# EAGLE board module_interface_hat v88 (EAGLE 9.7.0)
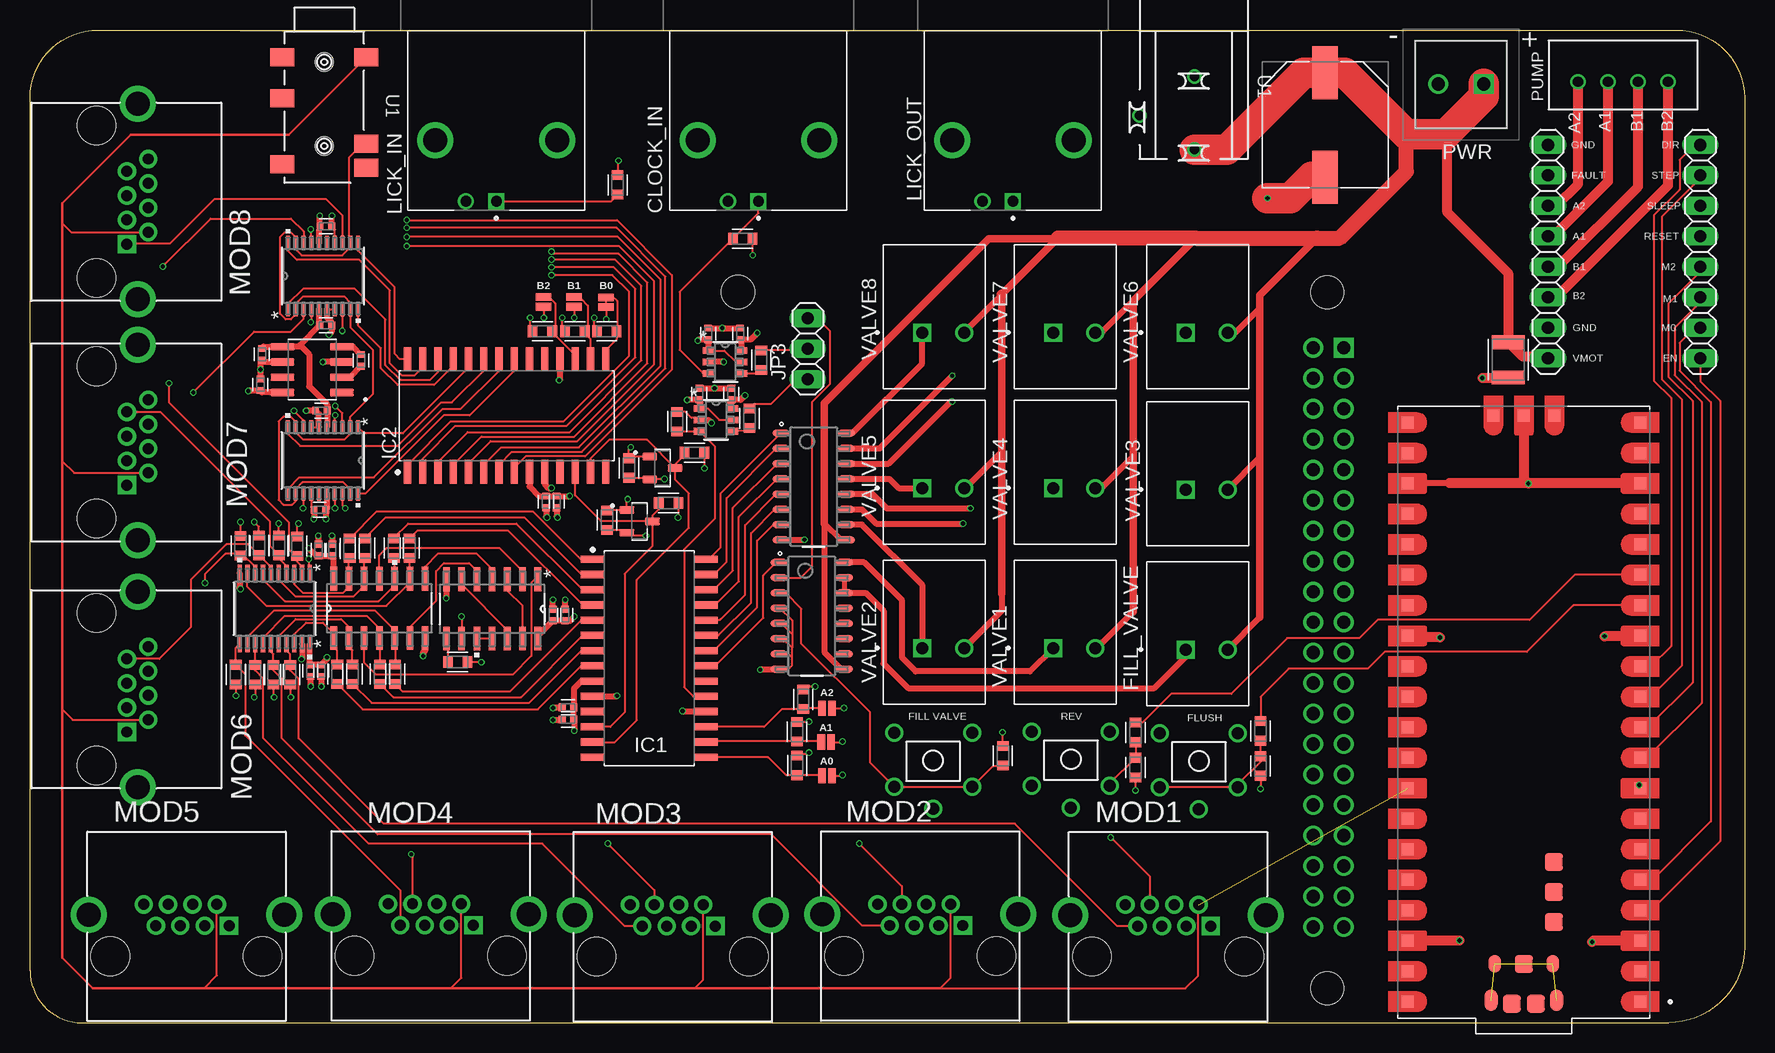
[diagram p0: board, top side]
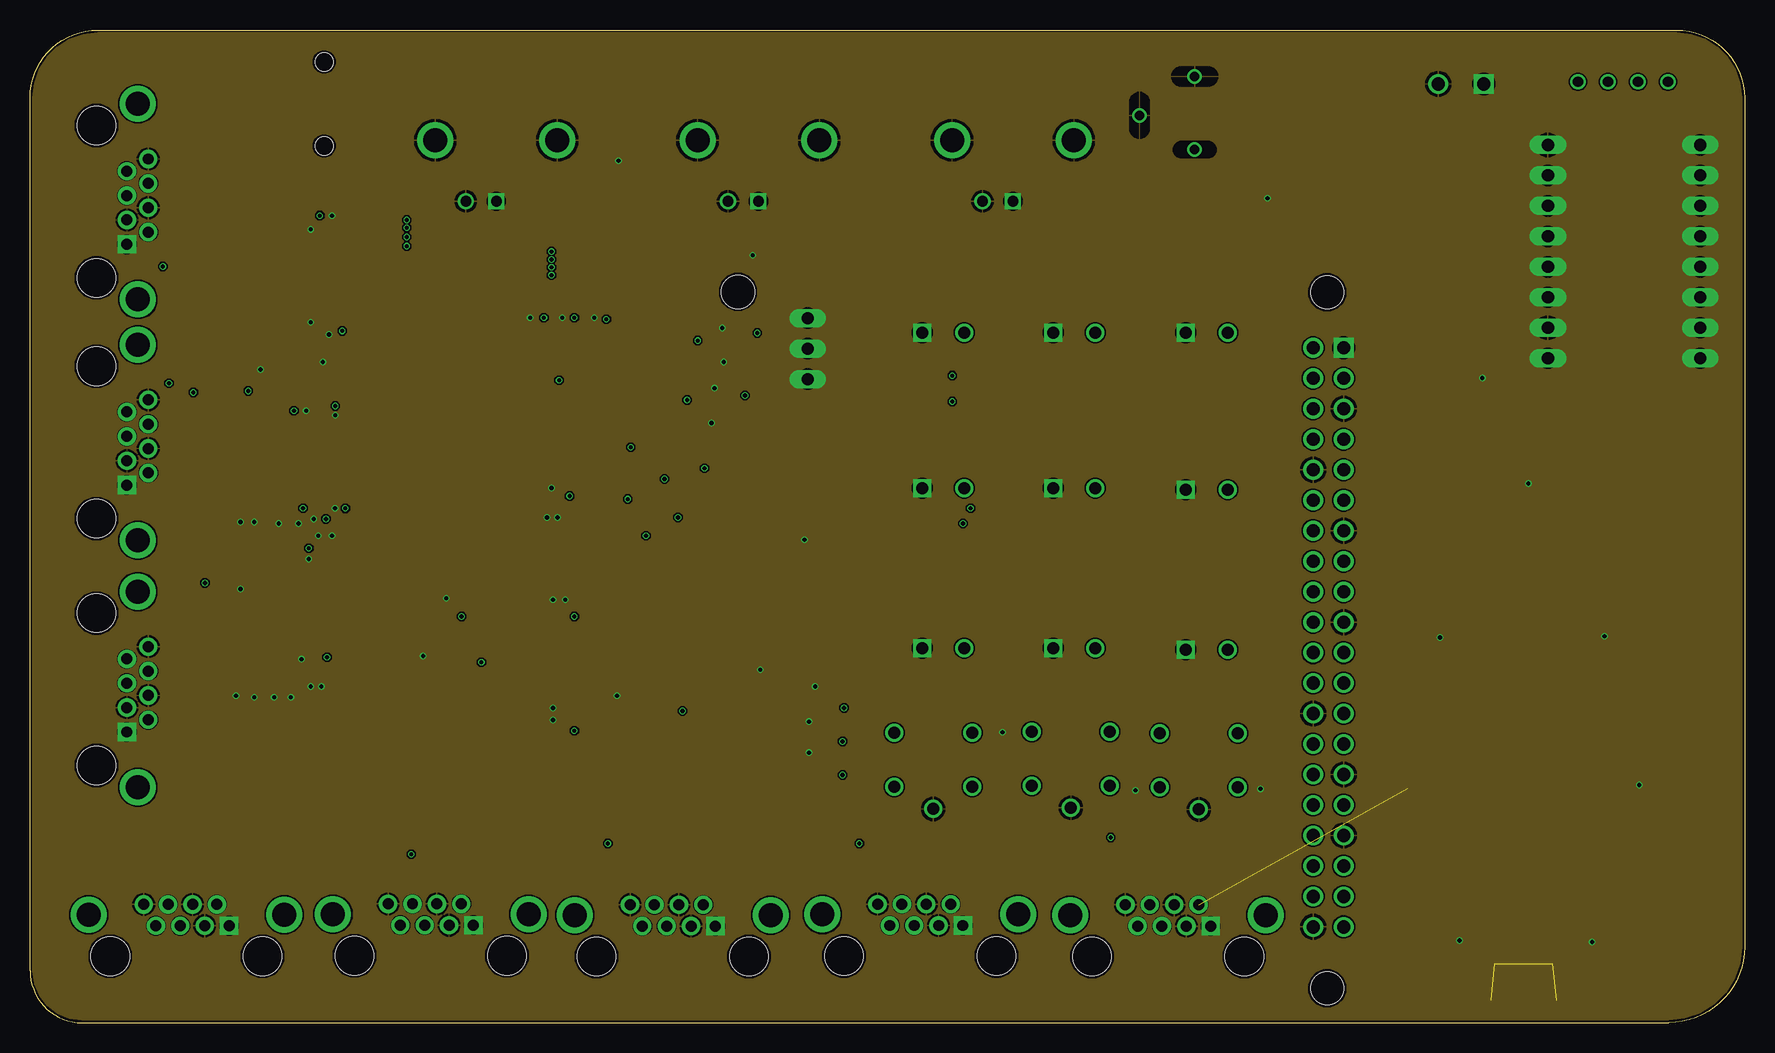
[diagram p1: board, inner layer Route2]
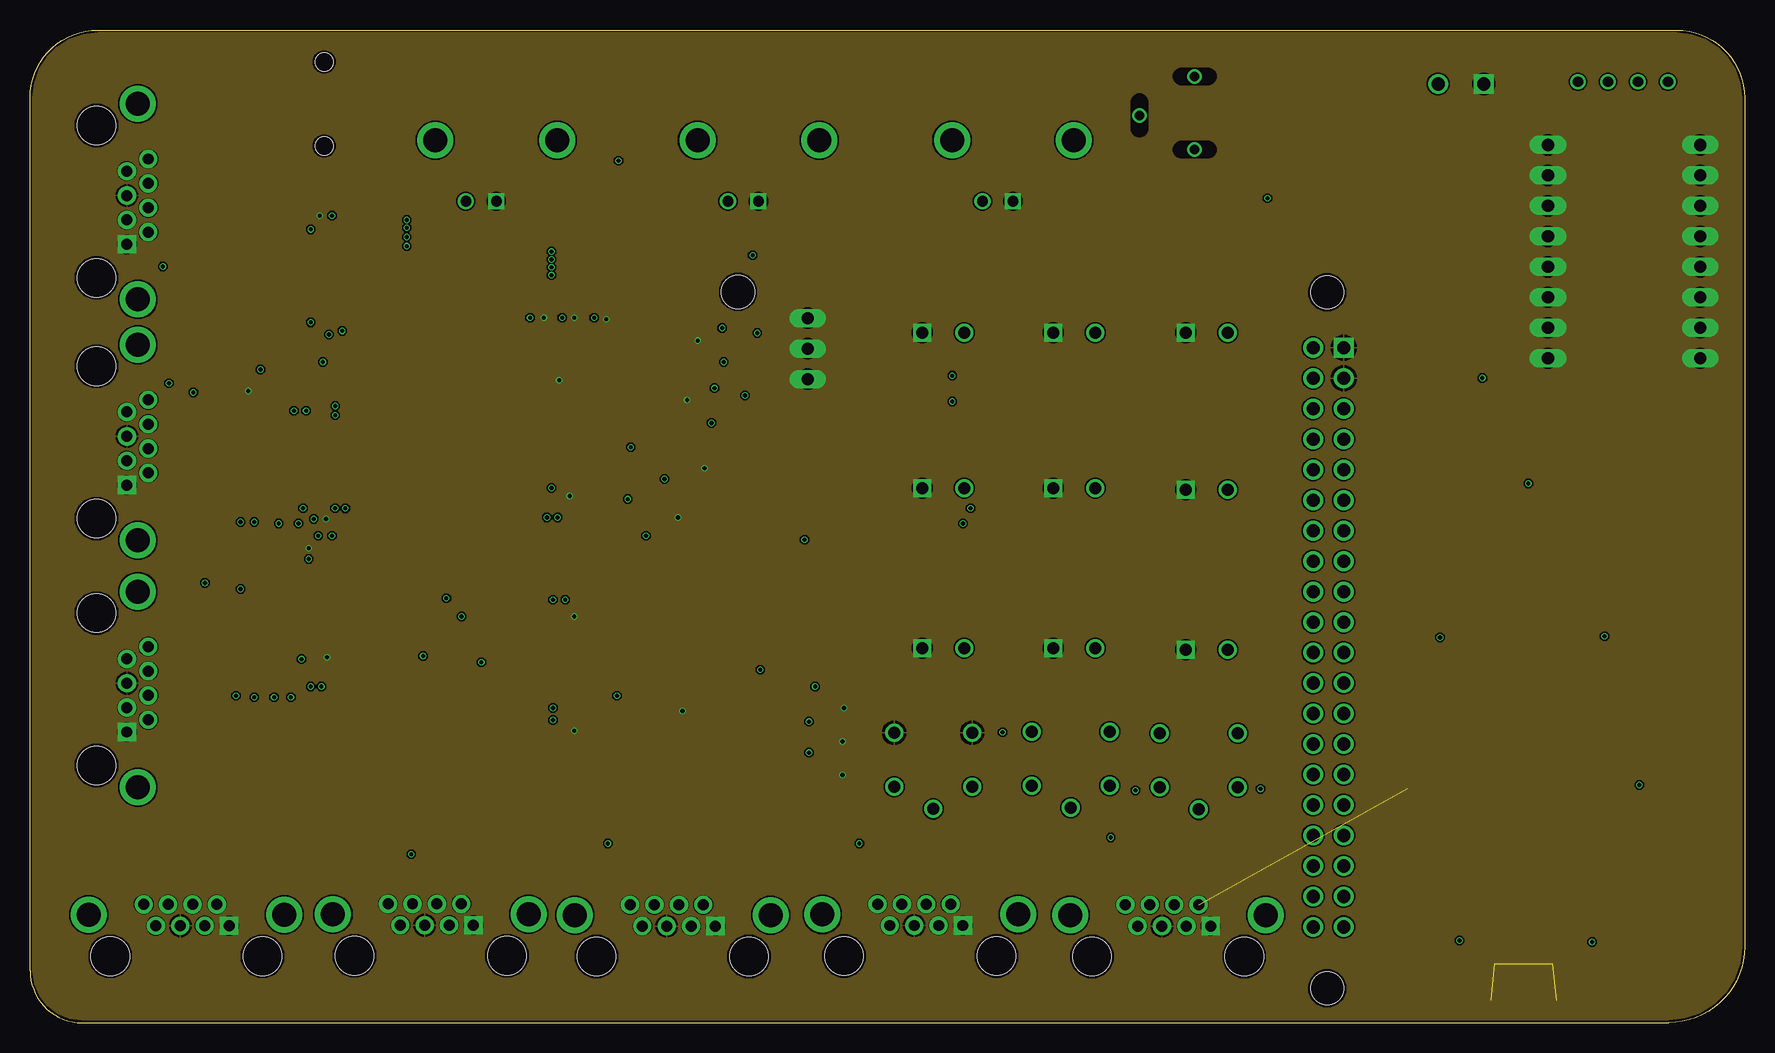
[diagram p2: board, inner layer Route15]
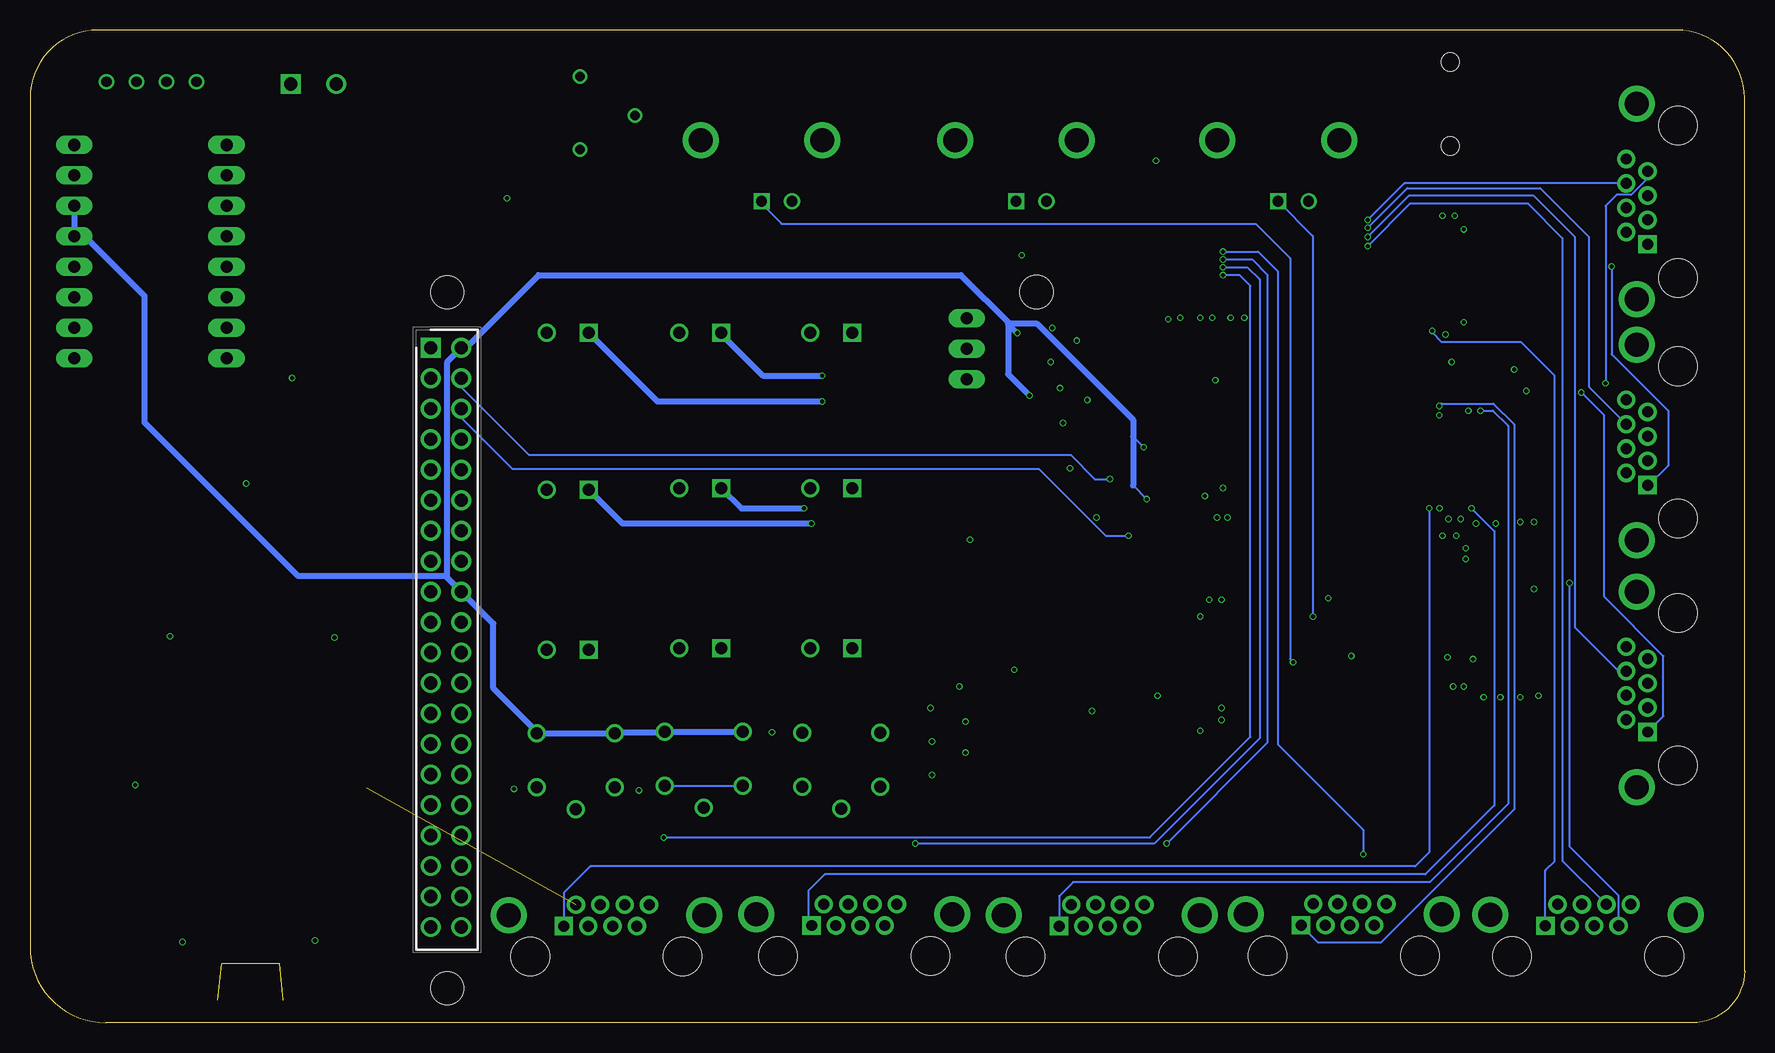
[diagram p3: board, bottom side, seen from below]

Size 142.88 x 82.73 mm. Coordinates in mm from the lower left corner, seen from the top.
Outline: 0,4.34 0,77.08 arc-90 5.65,82.73 137.22,82.73 arc-90 142.88,77.08 142.88,6.33 arc-90 136.54,0 4.34,0 arc-90 0,4.34
Copper layers (1*16): Top / Bottom
Stack-up Default Layer Stack: Top User Defined 0.035559375mm / Dielectric-1 User Defined 1.6mm / Bottom User Defined 0.035559375mm
Design rules: minimum drill size 12mil, minimum copper width 5mil, keepout clearance 0mil, drill distance 6mil, via restrict clearance 0mil, dimension clearance 8mil, restrict clearance 0mil, copper clearance wire_polygon to wire_polygon 5mil, copper clearance wire_polygon to pad_smd 5mil, copper clearance wire_polygon to via 5mil, copper clearance pad_smd to pad_smd 5mil, copper clearance pad_smd to via 5mil, copper clearance via to via 5mil, copper clearance smd to pad (same net) 5mil, copper clearance smd to via (same net) 5mil, copper clearance smd to smd (same net) 5mil
Holes 2.75 mm at 108.1,2.87 59,60.9 108.1,60.87

## Footprints (pad centres in the part's own frame; a part is rotated, then mirrored left to right if it is on the bottom)
SMT-JUMPER_2_NO_NO-SILK = smd 0.635 x 1.27: 1 -0.406,0; 2 0.406,0
PJ-3420-A-SMT = smd 1.5 x 2: 1 2.11,-3.49; 2 2.11,3.51; 3 5.51,-3.49; 4 9.31,3.51; 5 11.31,3.51; 6 11.01,-3.49 | hole 1.5: 2.5,0; 9.5,0
CAPC3225X135 = smd 1.165 x 2.715: 1 -1.475,0; 2 1.475,0
CAPAE1030X1050N = smd 4.416 x 2.115: 1 -4.353,0; 2 4.353,0
CAPC1005X60 = smd 0.56 x 0.629: 1 -0.485,0; 2 0.485,0
LINX_CONBNC002 = drill 0.89 square: 1 0,5.08 | drill 0.89: 2 2.54,5.08 | drill 2: S1 -5.08,0; S2 5.08,0
SKHHQYA010 = drill 1: P$1 0,0; P$2 6.5,0; P$3 6.5,-4.5; P$4 0,-4.5; P$5 3.25,-6.35
PHOENIX_1984963 = drill 1 square: 1 3.25,4.7 | drill 1: 2 6.75,4.7
SOIC127P1030X265-28 = smd 2 x 0.6: 1 -4.7,8.255; 2 -4.7,6.985; 3 -4.7,5.715; 4 -4.7,4.445; 5 -4.7,3.175; 6 -4.7,1.905; 7 -4.7,0.635; 8 -4.7,-0.635; 9 -4.7,-1.905; 10 -4.7,-3.175; 11 -4.7,-4.445; 12 -4.7,-5.715; 13 -4.7,-6.985; 14 -4.7,-8.255; 15 4.7,-8.255; 16 4.7,-6.985; 17 4.7,-5.715; 18 4.7,-4.445; 19 4.7,-3.175; 20 4.7,-1.905; 21 4.7,-0.635; 22 4.7,0.635; 23 4.7,1.905; 24 4.7,3.175; 25 4.7,4.445; 26 4.7,5.715; 27 4.7,6.985; 28 4.7,8.255
1X08 = drill 1.016 long: 1 -8.89,0; 2 -6.35,0; 3 -3.81,0; 4 -1.27,0; 5 1.27,0; 6 3.81,0; 7 6.35,0; 8 8.89,0
1X03 = drill 1.016 long: 1 -2.54,0; 2 0,0; 3 2.54,0
HC-RJ45-5JA-1-4 = drill 0.914 pad 1.524 square: 1 3.556,0.381 | drill 0.914 pad 1.524: 2 2.54,2.159; 3 1.524,0.381; 4 0.508,2.159; 5 -0.508,0.381; 6 -1.524,2.159; 7 -2.54,0.381; 8 -3.556,2.159 | drill 2 pad 2.54: 9 -8.15,1.3; 10 8.15,1.3 | hole 3.2: -6.35,-2.159; 6.35,-2.159
DC-005-2.5A-2.0 = drill 0.8 slot 3 rotated 90: 1 7.5,4.6; 3 13.6,4.6 | drill 0.8 slot 3: 2 10.75,0
B4B-XH-A = drill 0.84: 1 0,0; 2 2.5,0; 3 5,0; 4 7.5,0
1727010 = drill 1.1 pad 1.65 square: 1 0,0 | drill 1.1 pad 1.65: 2 3.81,0
SOT95P240X111-3N = smd 1.23 x 0.6: 1 -1.06,0.95; 2 -1.06,-0.95; 3 1.06,0
RESC1608X60 = smd 0.799 x 0.974: 1 -0.815,0; 2 0.815,0
RHDR40W64P254_2X20_5130X500X16 = drill 1.1 pad 1.65 square: 1 0,0 | drill 1.1 pad 1.65: 2 0,2.54; 3 2.54,0; 4 2.54,2.54; 5 5.08,0; 6 5.08,2.54; 7 7.62,0; 8 7.62,2.54; 9 10.16,0; 10 10.16,2.54; 11 12.7,0; 12 12.7,2.54; 13 15.24,0; 14 15.24,2.54; 15 17.78,0; 16 17.78,2.54; 17 20.32,0; 18 20.32,2.54; 19 22.86,0; 20 22.86,2.54; 21 25.4,0; 22 25.4,2.54; 23 27.94,0; 24 27.94,2.54; 25 30.48,0; 26 30.48,2.54; 27 33.02,0; 28 33.02,2.54; 29 35.56,0; 30 35.56,2.54; 31 38.1,0; 32 38.1,2.54; 33 40.64,0; 34 40.64,2.54; 35 43.18,0; 36 43.18,2.54; 37 45.72,0; 38 45.72,2.54; 39 48.26,0; 40 48.26,2.54
TSSOP20_4P4X6P5_TEX = smd 1.41 x 0.356: 1 -2.953,2.925; 2 -2.953,2.275; 3 -2.953,1.625; 4 -2.953,0.975; 5 -2.953,0.325; 6 -2.953,-0.325; 7 -2.953,-0.975; 8 -2.953,-1.625; 9 -2.953,-2.275; 10 -2.953,-2.925; 11 2.953,-2.925; 12 2.953,-2.275; 13 2.953,-1.625; 14 2.953,-0.975; 15 2.953,-0.325; 16 2.953,0.325; 17 2.953,0.975; 18 2.953,1.625; 19 2.953,2.275; 20 2.953,2.925
MODULE_SC0915 = smd 1 x 1: 1 -9.69,24.13; 2 -9.69,21.59; 3 -9.69,19.05; 4 -9.69,16.51; 5 -9.69,13.97; 6 -9.69,11.43; 7 -9.69,8.89; 8 -9.69,6.35; 9 -9.69,3.81; 10 -9.69,1.27; 11 -9.69,-1.27; 12 -9.69,-3.81; 13 -9.69,-6.35; 14 -9.69,-8.89; 15 -9.69,-11.43; 16 -9.69,-13.97; 17 -9.69,-16.51; 18 -9.69,-19.05; 19 -9.69,-21.59; 20 -9.69,-24.13; 21 9.69,-24.13; 22 9.69,-21.59; 23 9.69,-19.05; 24 9.69,-16.51; 25 9.69,-13.97; 26 9.69,-11.43; 27 9.69,-8.89; 28 9.69,-6.35; 29 9.69,-3.81; 30 9.69,-1.27; 31 9.69,1.27; 32 9.69,3.81; 33 9.69,6.35; 34 9.69,8.89; 35 9.69,11.43; 36 9.69,13.97; 37 9.69,16.51; 38 9.69,19.05; 39 9.69,21.59; 40 9.69,24.13; D1 -2.54,-24.7; D2 0,-24.7; D3 2.54,-24.7 | smd 1.1 x 1.8: A -2.725,24; B 2.725,24 | smd 1.05 x 1.45: C -2.425,20.97; D 2.425,20.97 | smd 1.5 x 1.5: TP1 0,21; TP2 1,24.3; TP3 -1,24.3; TP4 -2.5,17.5; TP5 -2.5,15; TP6 -2.5,12.5
D14 = smd 1.981 x 0.559: 1 -2.464,3.81; 2 -2.464,2.54; 3 -2.464,1.27; 4 -2.464,0; 5 -2.464,-1.27; 6 -2.464,-2.54; 7 -2.464,-3.81; 8 2.464,-3.81; 9 2.464,-2.54; 10 2.464,-1.27; 11 2.464,0; 12 2.464,1.27; 13 2.464,2.54; 14 2.464,3.81
D0016A_N = smd 1.45 x 0.6: 1 -2.725,4.445; 2 -2.725,3.175; 3 -2.725,1.905; 4 -2.725,0.635; 5 -2.725,-0.635; 6 -2.725,-1.905; 7 -2.725,-3.175; 8 -2.725,-4.445; 9 2.725,-4.445; 10 2.725,-3.175; 11 2.725,-1.905; 12 2.725,-0.635; 13 2.725,0.635; 14 2.725,1.905; 15 2.725,3.175; 16 2.725,4.445
SOT-23-6_DBV_TEX = smd 0.978 x 0.559: 1 -1.365,0.95; 2 -1.365,0; 3 -1.365,-0.95; 4 1.365,-0.95; 5 1.365,0; 6 1.365,0.95
RU_20_ADI-L = smd 1.168 x 0.305: 1 -2.769,2.925; 2 -2.769,2.275; 3 -2.769,1.625; 4 -2.769,0.975; 5 -2.769,0.325; 6 -2.769,-0.325; 7 -2.769,-0.975; 8 -2.769,-1.625; 9 -2.769,-2.275; 10 -2.769,-2.925; 11 2.769,-2.925; 12 2.769,-2.275; 13 2.769,-1.625; 14 2.769,-0.975; 15 2.769,-0.325; 16 2.769,0.325; 17 2.769,0.975; 18 2.769,1.625; 19 2.769,2.275; 20 2.769,2.925
SOIC127P600X175-8N = smd 1.97 x 0.59: 1 -2.475,1.905; 2 -2.475,0.635; 3 -2.475,-0.635; 4 -2.475,-1.905; 5 2.475,-1.905; 6 2.475,-0.635; 7 2.475,0.635; 8 2.475,1.905

## Placement (x,y rotation side)
A0  JUMPER-SMT_2_NO_NO-SILK  [SMT-JUMPER_2_NO_NO-SILK]  66.42,20.59 180 top
A1  JUMPER-SMT_2_NO_NO-SILK  [SMT-JUMPER_2_NO_NO-SILK]  66.34,23.39 180 top
A2  JUMPER-SMT_2_NO_NO-SILK  [SMT-JUMPER_2_NO_NO-SILK]  66.42,26.21 180 top
AUDIO  PJ-3420-A-SMT  [PJ-3420-A-SMT]  24.51,82.56 270 top
B0  JUMPER-SMT_2_NO_NO-SILK  [SMT-JUMPER_2_NO_NO-SILK]  48.01,60.05 90 top
B1  JUMPER-SMT_2_NO_NO-SILK  [SMT-JUMPER_2_NO_NO-SILK]  45.34,60.07 90 top
B2  JUMPER-SMT_2_NO_NO-SILK  [SMT-JUMPER_2_NO_NO-SILK]  42.8,60.07 90 top
C1  100µF  [CAPC3225X135]  123.19,55.25 270 top
C2  100µF  [CAPAE1030X1050N]  107.92,74.82 270 top
C3  0.1µF  [CAPC1005X60]  25.19,39.39 90 top
C4  0.1µF  [CAPC1005X60]  44.6,33.98 90 top
C5  0.1µF  [CAPC1005X60]  23.37,29.34 270 top
C6  1µF  [CAPC1005X60]  24.05,39.39 90 top
C7  1µF  [CAPC1005X60]  43.58,33.98 90 top
C8  1µF  [CAPC1005X60]  24.26,29.34 270 top
C9  10µF  [CAPC1005X60]  44.83,26.29 180 top
C10  0.1µF  [CAPC1005X60]  44.83,25.27 180 top
C11  10µF  [CAPC1005X60]  43.89,43.4 270 top
C12  0.1µF  [CAPC1005X60]  43,43.4 270 top
C13  0.1µF  [CAPC1005X60]  56.52,57.4 90 top
C14  0.1µF  [CAPC1005X60]  59.18,57.4 90 top
C15  0.1µF  [CAPC1005X60]  55.78,52.4 90 top
C16  0.1µF  [CAPC1005X60]  58.44,52.4 90 top
C17  0.1µF  [CAPC1005X60]  19.2,53.16 90 top
C18  10µF  [CAPC1005X60]  27.58,55.19 90 top
C19  10µF  [CAPC1005X60]  19.33,55.7 90 top
C20  0.1µF  [CAPC1005X60]  24.66,66.37 0 top
C21  0.1µF  [CAPC1005X60]  24.66,58.11 0 top
C22  0.1µF  [CAPC1005X60]  24.28,51 180 top
C23  0.1µF  [CAPC1005X60]  24.15,42.75 180 top
CLOCK_IN  CONBNC002  [LINX_CONBNC002]  60.71,73.53 180 top
FILL_BTN  SKHHQYA010  [SKHHQYA010]  72.01,24.16 0 top
FILL_VALVE  1984963  [PHOENIX_1984963]  93.06,26.4 0 top
FLUSH  SKHHQYA010  [SKHHQYA010]  94.16,24.12 0 top
IC1  MCP23017-E/SO-SOIC  [SOIC127P1030X265-28]  51.6,30.37 0 top
IC2  MCP23017-E/SO-SOIC  [SOIC127P1030X265-28]  39.72,50.6 90 top
JP1  PINHD-1X8  [1X08]  139.19,64.26 90 top
JP2  PINHD-1X8  [1X08]  126.49,64.26 90 top
JP3  PINHD-1X3  [1X03]  64.82,56.18 90 top
LICK_IN  CONBNC002  [LINX_CONBNC002]  38.86,73.53 180 top
LICK_OUT  CONBNC002  [LINX_CONBNC002]  81.92,73.53 180 top
MOD1  HC-RJ45-5JA-1-4  [HC-RJ45-5JA-1-4]  94.84,7.67 0 top
MOD2  HC-RJ45-5JA-1-4  [HC-RJ45-5JA-1-4]  74.19,7.72 0 top
MOD3  HC-RJ45-5JA-1-4  [HC-RJ45-5JA-1-4]  53.56,7.67 0 top
MOD4  HC-RJ45-5JA-1-4  [HC-RJ45-5JA-1-4]  33.4,7.74 0 top
MOD5  HC-RJ45-5JA-1-4  [HC-RJ45-5JA-1-4]  13.04,7.7 0 top
MOD6  HC-RJ45-5JA-1-4  [HC-RJ45-5JA-1-4]  7.7,27.78 270 top
MOD7  HC-RJ45-5JA-1-4  [HC-RJ45-5JA-1-4]  7.7,48.36 270 top
MOD8  HC-RJ45-5JA-1-4  [HC-RJ45-5JA-1-4]  7.7,68.42 270 top
POWER  DC-005-2.5A-2.0  [DC-005-2.5A-2.0]  92.46,86.36 270 top
PUMP  B4B-XH-A  [B4B-XH-A]  129,78.41 0 top
PWR  1727010  [1727010]  121.16,78.23 180 top
Q3  BSS138  [SOT95P240X111-3N]  50.8,41.78 0 top
Q4  BSS138  [SOT95P240X111-3N]  52.7,46.23 0 top
R1  22kΩ  [RESC1608X60]  102.54,24.32 270 top
R2  22kΩ  [RESC1608X60]  92.13,24.19 270 top
R3  100kΩ  [RESC1608X60]  48.97,69.82 270 top
R4  22kΩ  [RESC1608X60]  102.54,21.4 90 top
R5  22kΩ  [RESC1608X60]  92.13,21.27 90 top
R6  22kΩ  [RESC1608X60]  81.07,22.25 270 top
R7  100kΩ  [RESC1608X60]  21.69,29.01 90 top
R8  100kΩ  [RESC1608X60]  20.29,29.01 90 top
R9  100kΩ  [RESC1608X60]  18.77,29.01 90 top
R10  100kΩ  [RESC1608X60]  17.14,29.02 90 top
R11  100kΩ  [RESC1608X60]  17.55,39.75 270 top
R12  100kΩ  [RESC1608X60]  19.08,39.77 270 top
R13  100kΩ  [RESC1608X60]  20.75,39.77 270 top
R14  100kΩ  [RESC1608X60]  22.27,39.72 270 top
R15  22kΩ  [RESC1608X60]  26.64,39.53 90 top
R16  22kΩ  [RESC1608X60]  27.91,39.55 90 top
R17  22kΩ  [RESC1608X60]  30.32,39.55 90 top
R18  22kΩ  [RESC1608X60]  31.64,39.55 90 top
R19  10kΩ  [RESC1608X60]  63.91,24.25 270 top
R20  10kΩ  [RESC1608X60]  63.93,21.44 270 top
R21  10kΩ  [RESC1608X60]  64.44,26.95 270 top
R22  10kΩ  [RESC1608X60]  45.41,57.63 0 top
R23  10kΩ  [RESC1608X60]  48.07,57.62 0 top
R24  10kΩ  [RESC1608X60]  42.71,57.62 0 top
R25  50Ω  [RESC1608X60]  35.64,30.07 180 top
R26  22kΩ  [RESC1608X60]  60.93,55.22 270 top
R27  50Ω  [RESC1608X60]  59.38,65.34 0 top
R28  10kΩ  [RESC1608X60]  48.08,41.88 90 top
R29  10kΩ  [RESC1608X60]  55.37,47.5 180 top
R30  10kΩ  [RESC1608X60]  53.21,43.31 0 top
R31  10kΩ  [RESC1608X60]  49.91,46.23 270 top
R32  22kΩ  [RESC1608X60]  30.43,29.05 270 top
R33  22kΩ  [RESC1608X60]  29.16,29.05 270 top
R34  22kΩ  [RESC1608X60]  26.87,29.05 270 top
R35  22kΩ  [RESC1608X60]  25.6,29.05 270 top
R36  22kΩ  [RESC1608X60]  59.97,50.37 270 top
R37  100kΩ  [RESC1608X60]  53.93,50.09 90 top
REV  SKHHQYA010  [SKHHQYA010]  83.49,24.26 0 top
RPI_CONN  PRT-16763  [RHDR40W64P254_2X20_5130X500X16]  109.47,56.25 270 bottom
U1  SN74HCS244QPWRQ1TSSOP20_4P4X6P5_TEX  [TSSOP20_4P4X6P5_TEX]  20.4,34.51 270 top
U2  SC0915  [MODULE_SC0915]  124.49,25.89 180 top
U3  SN74HCT32DRD14  [D14]  29.11,34.53 90 top
U4  SN74HCT32DRD14  [D14]  38.51,34.49 270 top
U5  ULN2003ADRD0016A_N  [D0016A_N]  65.31,44.69 0 top
U6  ULN2003ADRD0016A_N  [D0016A_N]  65.15,33.91 0 top
U7  SN74LXC1T45DBVRSOT-23-6_DBV_TEX  [SOT-23-6_DBV_TEX]  57.17,50.24 0 top
U8  SN74LXC1T45DBVRSOT-23-6_DBV_TEX  [SOT-23-6_DBV_TEX]  57.94,55.07 0 top
U9  ADG1434YRUZRU_20_ADI-L  [RU_20_ADI-L]  24.41,46.86 270 top
U10  ADG1434YRUZRU_20_ADI-L  [RU_20_ADI-L]  24.42,62.23 90 top
U11  MAX1044ESA-T  [SOIC127P600X175-8N]  23.52,54.43 180 top
VALVE1  1984963  [PHOENIX_1984963]  82.02,26.52 0 top
VALVE2  1984963  [PHOENIX_1984963]  71.09,26.52 0 top
VALVE3  1984963  [PHOENIX_1984963]  93.06,39.73 0 top
VALVE4  1984963  [PHOENIX_1984963]  82.02,39.86 0 top
VALVE5  1984963  [PHOENIX_1984963]  71.09,39.86 0 top
VALVE6  1984963  [PHOENIX_1984963]  93.06,52.81 0 top
VALVE7  1984963  [PHOENIX_1984963]  82.02,52.81 0 top
VALVE8  1984963  [PHOENIX_1984963]  71.09,52.81 0 top

## Library data of the parts
A0 A1 A2 B0 B1 B2 = SparkFun-Jumpers
AUDIO = XKB_Connectivity; JLCPCB_PART_NUMBER: C319102; MANUFACTURER: XKB Connectivity; MANUFACTURER_PART_NUMBER: PJ-3420-A-SMT
C1-C23 = Capacitor; CATEGORY: Capacitor
CLOCK_IN LICK_IN LICK_OUT = CONBNC002; AVAILABILITY: In Stock; CHECK_PRICES: https://www.snapeda.com/parts/CONBNC002/Linx/view-part/?ref=eda; DESCRIPTION: BNC Jack 50 Ohm PCB Through Hole; MF: Linx Technologies Inc.; MP: CONBNC002; PACKAGE: None; PRICE: None; PURCHASE-URL: https://www.snapeda.com/api/url_track_click_mouser/?unipart_id=10849425&manufacturer=Linx Technologies Inc.&part_name=CONBNC002&search_term=None; SNAPEDA_LINK: https://www.snapeda.com/parts/CONBNC002/Linx/view-part/?ref=snap
FILL_BTN FLUSH REV = SKHHQYA010
FILL_VALVE VALVE1-VALVE8 = 1727010; MANUFACTURER: Phoenix Contact; MAXIMUM_PACKAGE_HEIGHT: 13.1mm; PARTREV: 18.07.2018; STANDARD: Manufacturer Recommendations
IC1 IC2 = IC_Interface; CATEGORY: IC_Interface; DESCRIPTION: I/O Expander 16 I²C 1.7MHz; MANUFACTURER: Microchip Technology; MPN: MCP23017-E/SO; OPERATING_TEMP: -40°C to 125°C; PART_STATUS: Active; ROHS_COMPLIANT: ROHS3 Compliant; SUB-CATEGORY: I/O Expander; TYPE: 16 bit
JP1 JP2 = Connector; CATEGORY: Headers; DESCRIPTION: Header, Straight, 8 Position; MANUFACTURER: Generic; MPN: Generic; OPERATING_TEMPERATURE: Generic; PART_STATUS: Active; PITCH: 0.100" (2.54mm); ROHS_COMPLIANCE: Generic; SERIES: Generic; SUB-CATEGORY: Headers, Male Pins; TYPE: Board to Board or Cable, Unshrouded, Through Hole, Straight
JP3 = Connector; CATEGORY: Headers; DESCRIPTION: Header, Straight, 3 Position; MANUFACTURER: Generic; MPN: Generic; OPERATING_TEMPERATURE: Generic; PART_STATUS: Active; PITCH: 0.100" (2.54mm); ROHS_COMPLIANCE: Generic; SERIES: Generic; SUB-CATEGORY: Headers, Male Pins; TYPE: Board to Board or Cable, Unshrouded, Through Hole, Straight
MOD1-MOD8 = HCTL
POWER = XKB_Connectivity; MANUFACTURER: XKB Connectivity; MANUFACTURER_PART_NUMBER: DC-005-2.5A-2.0
PUMP = Connector; CATEGORY: Header; DSECRIPTION: Connector Header Through Hole 4 position 0.098" (2.50mm); MANUFACTURER: JST Sales America Inc.; MPN: B4B-XH-A(LF)(SN); OPERATING_TEMPERATURE: -25 C to 85 C; PART_STATUS: ACTIVE; PITCH: 0.098" (2.50mm); ROHS_COMPLIANCE: ROHS3 Compliant; SERIES: XH; SUB_CATEGORY: Rectangular Connectors; TYPE: Header, Male Pin, Board to Cable/Wire, Through Hole
PWR = 1727010; DESCRIPTION: Conn PC Terminal Block 2 POS 3.81mm Solder ST Thru-Hole 13.5A; HEIGHT: 8.65mm; MANUFACTURER_NAME: Phoenix Contact; MANUFACTURER_PART_NUMBER: 1727010; MOUSER_PART_NUMBER: 651-1727010; MOUSER_PRICE-STOCK: https://www.mouser.co.uk/ProductDetail/Phoenix-Contact/1727010?qs=JcjeNNoqGSMjtHhQoBJ7UA%3D%3D
Q3 Q4 = BSS138; AVAILABILITY: In Stock; DESCRIPTION: N-Channel 50 V 200mA (Ta) 225mW (Ta) Surface Mount SOT-23-3 (TO-236); MF: ON Semiconductor; MP: BSS138; PACKAGE: SOT-23 ON; PRICE: None
R1-R37 = Resistor; CATEGORY: Resistor; SUB-CATEGORY: Fixed
RPI_CONN = PRT-16763; DESCRIPTION: Headers & Wire Housings Extended GPIO Female Header - 2x20 Pin (16mm/7.30mm); HEIGHT: 16.25mm; MANUFACTURER_NAME: SparkFun; MANUFACTURER_PART_NUMBER: PRT-16763; MOUSER_PART_NUMBER: 474-PRT-16763; MOUSER_PRICE-STOCK: https://www.mouser.co.uk/ProductDetail/SparkFun/PRT-16763?qs=W%2FMpXkg%252BdQ5xeCq%2FGKjnlQ%3D%3D
U1 = 2024-03-31_00-23-18_Library; COPYRIGHT: Copyright (C) 2024 Ultra Librarian. All rights reserved.; MANUFACTURER_PART_NUMBER: SN74HCS244QPWRQ1; MFR_NAME: Texas Instruments
U2 = SC0915; MANUFACTURER: Pi Supply; PARTREV: 1.9; SNAPEDA_PN: SC0915; STANDARD: Manufacturer Recommendations
U3 U4 = 2023-12-07_08-39-36_Library; COPYRIGHT: Copyright (C) 2023 Ultra Librarian. All rights reserved.; MANUFACTURER_PART_NUMBER: SN74HCT32DR; MFR_NAME: Texas Instruments
U5 U6 = 2023-12-07_08-28-53_Library; COPYRIGHT: Copyright (C) 2023 Ultra Librarian. All rights reserved.; MANUFACTURER_PART_NUMBER: ULN2003ADR; MFR_NAME: Texas Instruments; REFDES: RefDes; TYPE: TYPE
U7 U8 = 2024-04-06_11-04-47_Library; COPYRIGHT: Copyright (C) 2024 Ultra Librarian. All rights reserved.; MANUFACTURER_PART_NUMBER: SN74LXC1T45DBVR; MFR_NAME: Texas Instruments
U9 U10 = 2024-07-30_20-37-17_Library; COPYRIGHT: Copyright (C) 2024 Ultra Librarian. All rights reserved.; MANUFACTURER_PART_NUMBER: ADG1434YRUZ; MFR_NAME: Analog Devices Inc
U11 = MAX1044ESA-T

## Nets
3V3_OUT: U2.36
+3.3V: C14.1 C16.1 FLUSH.P$1 FLUSH.P$2 JP1.5 JP1.6 Q3.1 Q4.1 R28.2 R31.1 REV.P$1 REV.P$2 RPI_CONN.2 RPI_CONN.18 U7.6 U8.6
+5V: A0.1 A1.1 A2.1 B0.1 B0.2 B1.1 B2.1 C3.1 C4.1 C5.1 C6.1 C7.1 C8.1 C9.1 C10.1 C11.1 C12.1 C13.1 C15.1 C17.1 C20.1 C23.1 FILL_BTN.P$1 FILL_BTN.P$2 IC1.9 IC1.18 IC2.9 IC2.15 IC2.18 MOD1.5 MOD2.5 MOD3.5 MOD4.5 MOD5.5 MOD6.5 MOD7.5 MOD8.5 R23.2 R29.1 R30.2 RPI_CONN.1 RPI_CONN.3 U1.20 U3.14 U4.14 U7.1 U7.5 U8.1 U8.5 U9.16 U10.16 U11.8
+12V: C1.1 C2.1 FILL_VALVE.2 JP2.1 POWER.3 PWR.1 U5.9 U6.9 VALVE1.2 VALVE2.2 VALVE3.2 VALVE4.2 VALVE5.2 VALVE6.2 VALVE7.2 VALVE8.2
-5V: C19.2 C21.1 C22.1 U9.5 U10.5 U11.5
A1: JP2.5 PUMP.2
A2: JP2.6 PUMP.1
A+: AUDIO.4 U9.2 U9.9 U9.12 U9.19 U10.2 U10.9 U10.12 U10.19
ADC_VREF: U2.35
ADDR_A0: A0.2 IC1.15 R20.2
ADDR_A1: A1.2 IC1.16 R19.2
ADDR_A2: A2.2 IC1.17 R21.2
ADDR_B1: B1.2 IC2.16 R22.2
ADDR_B2: B2.2 IC2.17 R24.2
AGND: AUDIO.2 MOD1.2 MOD2.2 MOD3.2 MOD4.2 MOD5.2 MOD6.2 MOD7.2 MOD8.2 U2.33
AUDIO1: MOD1.1 U9.18
AUDIO2: MOD2.1 U9.13
AUDIO3: MOD3.1 U9.8
AUDIO4: MOD4.1 U9.3
AUDIO5: MOD5.1 U10.8
AUDIO6: MOD6.1 U10.3
AUDIO7: MOD7.1 U10.18
AUDIO8: MOD8.1 U10.13
B1: JP2.4 PUMP.3
B2: JP2.3 PUMP.4
CLOCK_IN: JP3.2 R26.1
DIR: JP1.8 U2.12
ENABLE: JP1.1 U2.4
FILL_VALVE: FILL_VALVE.1 U6.14 U6.15
FILL_VALVE_MAN: FILL_BTN.P$3 FILL_BTN.P$4 R6.2 U6.3
FILL_VALVE_PROG: JP3.3 U6.2
FLUSH: R1.1 U2.14
FLUSH_BTN_OUT: FLUSH.P$3 FLUSH.P$4 R1.2 R4.2
GND: C1.2 C2.2 C3.2 C4.2 C5.2 C6.2 C7.2 C8.2 C9.2 C10.2 C11.2 C12.2 C13.2 C14.2 C15.2 C16.2 C17.2 C19.1 C20.2 C21.2 C22.2 C23.2 CLOCK_IN.2 CLOCK_IN.S1 CLOCK_IN.S2 FILL_BTN.P$5 FLUSH.P$5 IC1.10 IC2.10 JP2.2 JP2.8 LICK_IN.2 LICK_IN.S1 LICK_IN.S2 LICK_OUT.2 LICK_OUT.S1 LICK_OUT.S2 MOD1.3 MOD1.4 MOD1.8 MOD2.3 MOD2.4 MOD2.8 MOD3.3 MOD3.4 MOD3.8 MOD4.3 MOD4.4 MOD4.8 MOD5.3 MOD5.4 MOD5.8 MOD6.3 MOD6.4 MOD6.8 MOD7.3 MOD7.4 MOD7.8 MOD8.3 MOD8.4 MOD8.8 POWER.1 POWER.2 PWR.2 R3.1 R4.1 R5.1 R6.1 R7.1 R8.1 R9.1 R10.1 R11.1 R12.1 R13.1 R14.1 R19.1 R20.1 R21.1 R22.1 R23.1 R24.1 R27.2 R37.2 REV.P$5 RPI_CONN.5 RPI_CONN.10 RPI_CONN.13 RPI_CONN.19 RPI_CONN.26 RPI_CONN.29 RPI_CONN.33 RPI_CONN.40 U1.1 U1.10 U1.19 U2.3 U2.8 U2.13 U2.18 U2.23 U2.28 U2.38 U2.D2 U3.7 U4.7 U5.8 U6.4 U6.5 U6.6 U6.7 U6.8 U7.2 U8.2 U9.4 U9.6 U9.7 U9.14 U9.17 U10.4 U10.6 U10.7 U10.14 U10.17 U11.3 U11.6
LED1: IC2.1 MOD1.6
LED2: IC2.2 MOD2.6
LED3: IC2.3 MOD3.6
LED4: IC2.4 MOD4.6
LED5: IC2.5 MOD5.6
LED6: IC2.6 MOD6.6
LED7: IC2.7 MOD7.6
LED8: IC2.8 MOD8.6
LICK1: MOD1.7 R7.2 U1.17
LICK1_2_7_8_OR: U4.3 U4.13
LICK1_2_OR: U3.11 U4.2
LICK1_DIG: R15.1 U1.3 U3.13
LICK2: MOD2.7 R8.2 U1.15
LICK2_DIG: R16.1 U1.5 U3.12
LICK3: MOD3.7 R9.2 U1.13
LICK3_4_5_6_OR: U4.6 U4.12
LICK3_4_OR: U3.8 U4.4
LICK3_DIG: R17.1 U1.7 U3.10
LICK4: MOD4.7 R10.2 U1.11
LICK4_DIG: R18.1 U1.9 U3.9
LICK5: MOD5.7 R11.2 U1.8
LICK5_6_OR: U3.6 U4.5
LICK5_DIG: R32.1 U1.12 U3.5
LICK6: MOD6.7 R12.2 U1.6
LICK6_DIG: R33.1 U1.14 U3.4
LICK7: MOD7.7 R13.2 U1.4
LICK7_8_OR: U3.3 U4.1
LICK7_DIG: R34.1 U1.16 U3.2
LICK8: MOD8.7 R14.2 U1.2
LICK8_DIG: R35.1 U1.18 U3.1
LICK_BUS_INT: IC1.19 R37.1 U7.3
LICK_BUS_INT2: JP3.1 R36.1
LICK_IN: LICK_IN.1 R3.2 U4.9
LICK_OUT: R25.2 U4.8
M0: JP1.2 U2.5
M1: JP1.3 U2.9
M2: JP1.4 U2.10
MOD_OR: U4.10 U4.11
N$4: LICK_OUT.1 R25.1
N$7: CLOCK_IN.1 R27.1 U8.3
N$8: R26.2 U8.4
N$10: IC1.1 R15.2
N$11: IC1.2 R16.2
N$12: IC1.3 R17.2
N$13: IC1.4 R18.2
N$14: IC1.5 R32.2
N$15: IC1.6 R33.2
N$16: IC1.7 R34.2
N$17: IC1.8 R35.2
N$18: R36.2 U7.4
N$19: C18.1 U11.2
N$20: C18.2 U11.4
REV: R2.1 U2.15
REV_BTN_OUT: R2.2 R5.2 REV.P$3 REV.P$4
SCL: IC1.12 IC2.12 Q3.3 R30.1
SCL_PI: Q3.2 R28.1 RPI_CONN.6
SD1: IC2.21 U9.20
SD2: IC2.22 U9.11
SD3: IC2.23 U9.10
SD4: IC2.24 U9.1
SD5: IC2.25 U10.10
SD6: IC2.26 U10.1
SD7: IC2.27 U10.20
SD8: IC2.28 U10.11
SDA: IC1.13 IC2.13 Q4.3 R29.2
SDA_PI: Q4.2 R31.2 RPI_CONN.4
STEP: JP1.7 U2.11
TP1_GND: U2.TP1
USB_SHIELD: U2.A U2.B U2.C U2.D
VALVE1: U6.16 VALVE1.1
VALVE1_PROG: IC1.21 U6.1
VALVE2: U5.10 VALVE2.1
VALVE2_PROG: IC1.22 U5.7
VALVE3: U5.11 VALVE3.1
VALVE3_PROG: IC1.23 U5.6
VALVE4: U5.12 VALVE4.1
VALVE4_PROG: IC1.24 U5.5
VALVE5: U5.13 VALVE5.1
VALVE5_PROG: IC1.25 U5.4
VALVE6: U5.14 VALVE6.1
VALVE6_PROG: IC1.26 U5.3
VALVE7: U5.15 VALVE7.1
VALVE7_PROG: IC1.27 U5.2
VALVE8: U5.16 VALVE8.1
VALVE8_PROG: IC1.28 U5.1
VBUS: U2.40
VSYS: U2.39

## Tracks (layer width: path | path; a pad name or v marks a point on that pad's centre or on a via)
+3.3V  (via drill 0.35)
  Top 0.152: Q4.1 50.05,47.18 R31.1 49.91,47.8 v50.06,47.95 | R28.2 49.7,42.7 Q3.1 49.74,43.57 v49.81,43.64
  Top 0.508: U7.6 58.44,51.28 C16.1 59.23,51.91 v59.59,52.27 | U8.6 59.3,56.8 C14.1 60.04,56.92 v60.6,57.48
  Bottom 0.152: v49.81,43.64 50.95,44.78 | v50.06,47.95 50.95,48.84
  Bottom 0.508: 139.06,65.53 138.3,65.53 133.35,60.58 133.35,50.04 120.57,37.26 108.26,37.26 RPI_CONN.18 | 139.06,65.53 JP1.5 | JP1.6 139.19,65.66 139.06,65.53 | RPI_CONN.18 104.27,33.26 104.27,27.85 100.66,24.25 FLUSH.P$2 FLUSH.P$1 94.06,24.22 90.03,24.22 REV.P$2 REV.P$1 | 61.24,58.24 65.3,62.3 100.48,62.3 106.54,56.25 RPI_CONN.2 108.14,55.04 108.14,37.13 RPI_CONN.18 | 61.36,58.24 v60.6,57.48 | 50.95,44.78 50.95,48.84 50.95,50.24 58.95,58.24 61.24,58.24 | 61.24,58.24 61.36,58.24 | 61.36,58.24 61.36,54.05 v59.59,52.27
+5V  (via drill 0.35)
  Top 0.152: v48.03,58.62 48.01,58.64 B0.1 B0.2 48.01,60.53 48.54,60.53 48.92,60.15 48.92,57.66 R23.2 48.88,56.96 47.98,56.06 IC2.15 | A2.1 67.81,26.21 v67.84,26.24 | A1.1 67.66,23.39 v67.71,23.44 | A0.1 67.66,20.59 v67.71,20.65 | B1.1 45.34,58.77 v45.36,58.75 | B2.1 42.8,58.77 v42.82,58.75 | U7.1 56.48,51.19 57.43,50.24 U7.5 | U8.1 57.87,56.02 58.82,55.07 U8.5 | R30.2 54.03,42.14 v54,42.11 | v56.21,46.2 56.19,46.23 R29.1
  Top 0.508: U4.14 42.32,32.23 C7.1 C4.1 45,33.49 v45.36,33.86 | v23.24,39.54 23.25,39.54 23.89,38.91 C6.1 C3.1 25.3,38.79 U3.14 | U1.20 23.32,29.91 23.37,29.86 C5.1 C8.1 24.73,30.3 24.73,30.43 24.76,30.45 v24.76,30.46 | U10.16 24.1,65.95 C20.1 24.15,66.39 v24.15,67.26 | U11.8 19.35,52.52 C17.1 18.21,52.68 v18.18,52.65 | U9.16 24.73,42.84 C23.1 24.64,42.01 v24.66,41.98 | IC1.9 46.86,28.52 46,28.52 45.32,27.83 C9.1 C10.1 45.36,25.23 v45.36,24.33 | IC2.9 41.63,44.7 42.44,43.89 C12.1 C11.1 v44.97,43.89 | U7.1 55.81,51.88 C15.1 54.78,51.91 v54.76,51.89 | U8.1 56.52,56.07 C13.1 55.73,56.92 v55.65,56.84 | IC2.18 44.17,53.62 v44.09,53.54 | IC1.18 54.43,25.93 v54.38,25.98 | v44.97,43.89
  pour Route15: 4.34,0 arc-90 0,4.34 0,77.03 arc-90 5.7,82.73 137.19,82.73 arc-90 142.85,77.06 142.85,6.31 arc-90 136.55,0
+12V
  Top 0.508: 80.96,60.65 77.84,57.54 VALVE8.2 | 80.96,47.68 80.96,48.08 | 91.92,47.21 89.27,44.56 VALVE4.2 | 102.49,33.77 FILL_VALVE.2 | U5.9 67.55,40.24 66.19,41.6 66.19,30.89 67.61,29.46 U6.9 | 91.92,60.18 89.25,57.51 VALVE7.2 | 91.92,34.25 88.89,31.22 VALVE1.2 | 80.96,47.6 77.92,44.56 VALVE5.2 | 102.49,59.56 100.44,57.51 VALVE6.2 | 102.49,47.39 102.49,47.11 VALVE3.2 | 80.96,35.76 80.96,34.34 VALVE2.2
  Top 0.61: 97.13,65.39 91.92,60.18 91.92,47.21 91.92,34.25 | 102.49,33.77 102.49,47.39 102.49,59.56 102.49,60.64 107.24,65.39 | 80.96,60.65 80.96,48.08 80.96,47.6 80.96,35.76 | 85.62,65.35 80.96,60.69 | 66.19,41.6 66.19,51.64 79.91,65.35 85.62,65.35 | 85.62,65.35 85.66,65.39
  Top 0.813: 80.96,60.65 80.96,60.69 | JP2.1 126.36,55.5 124.41,55.5 C1.1 123.17,56.74 123.17,62.48 118.12,67.52 118.12,74.18
  Top 1.27: 85.66,65.39 97.13,65.39 107.24,65.39 109.14,65.39 114.69,70.94 114.69,74.05
  Top 2.54: POWER.3 99.72,72.76 106.14,79.17 C2.1 109.57,79.17 114.69,74.05 117.99,74.05 118.12,74.18 121.16,77.22 PWR.1
-5V
  Top 0.508: C19.2 19.48,56.34 U11.5 22.63,56.34 | 22.63,56.34 22.5,56.46 24.15,58.11 C21.1 24.1,58.19 U10.5 | 22.63,56.34 23.26,55.7 23.26,53.03 24.77,51.53 C22.1 24.77,49.66 U9.5
A1
  Top 0.813: JP2.5 126.52,65.51 126.9,65.51 131.5,70.11 PUMP.2
A2
  Top 0.813: JP2.6 127.18,68.07 129,69.89 129,71.19 129,72.46 PUMP.1
A+
  Top 0.152: AUDIO.4 27.36,72.59 27.07,72.59 26.57,72.08 26.57,65.13 U10.12 26.7,64.62 26.03,63.95 22.63,63.95 22.15,64.44 U10.19 22.15,65.45 21.74,65.86 21.23,65.86 20.85,65.48 20.85,59.08 21.31,58.62 21.74,58.62 22.15,59.03 U10.2 22.15,59.92 22.76,60.53 26.19,60.53 26.7,60.01 U10.9 26.7,57.94 28.6,56.04 28.6,52.4 26.68,50.48 U9.2 26.68,49.09 26.19,48.59 22.76,48.59 22.13,49.21 U9.9 22.13,50.1 21.74,50.49 21.11,50.49 20.72,50.11 20.72,43.57 21.12,43.18 21.85,43.18 22.13,43.46 U9.12 22.13,44.47 22.7,45.03 26.12,45.03 26.64,44.51 26.64,44.13 U9.19
ADDR_A0
  Top 0.152: IC1.15 61.51,22.12 63,20.63 R20.2 65.97,20.63 A0.2
ADDR_A1
  Top 0.152: A1.2 65.89,23.44 R19.2 56.35,23.44 IC1.16
ADDR_A2
  Top 0.152: IC1.17 61.18,24.66 62.66,26.13 R21.2 64.51,26.21 A2.2
ADDR_B1
  Top 0.152: B1.2 45.5,60.31 45.93,60.31 46.48,59.76 46.48,57.88 R22.2 46.23,57.47 46.71,57 IC2.16
ADDR_B2
  Top 0.152: B2.2 42.84,60.44 43.26,60.44 43.76,59.94 43.76,57.87 R24.2 43.52,57.5 43.74,57.27 43.77,57.27 45.44,55.61 IC2.17
AGND  (1 unrouted)
  Top 0.152: 97.35,9.8 97.35,3.93 96.29,2.87 75.84,2.87 76.73,3.75 MOD2.2 | 2.69,66.62 3.43,65.88 MOD8.2 | 2.69,46.81 3.68,45.82 MOD7.2 | 2.69,26.11 3.56,25.24 MOD6.2 | 14.5,2.87 15.57,3.94 MOD5.2 | 35.08,2.87 35.94,3.73 MOD4.2 | 55.4,2.87 56.1,3.58 MOD3.2
  Top 0.203: AUDIO.2 21.55,73.99 8.41,73.99 2.69,68.27 2.69,66.62 2.69,46.81 2.69,26.11 2.69,5.41 5.23,2.87 14.5,2.87 35.08,2.87 55.4,2.87 75.84,2.87 | 97.35,9.8 MOD1.2
AUDIO1  (via drill 0.35)
  Top 0.152: U9.18 26.03,43.11 v26.28,42.87
  Bottom 0.152: MOD1.1 98.39,10.81 96.18,13.03 27.46,13.03 26.28,14.21 v26.28,42.87
AUDIO2  (via drill 0.35)
  Top 0.152: U9.13 22.76,44.07 v22.76,42.87
  Bottom 0.152: v22.76,42.87 20.85,40.97 20.85,18.11 26.59,12.37 76.63,12.37 78,11 78,8.36 MOD2.1
AUDIO3  (via drill 0.35)
  Top 0.152: U9.8 22.78,50.21 v21.99,51
  Bottom 0.152: v21.99,51 20.98,51 19.71,49.73 19.71,18.23 26.24,11.71 55.95,11.71 57.12,10.54 MOD3.1
AUDIO4  (via drill 0.35)
  Top 0.152: U9.3 26.03,50.8 v25.44,51.39 v25.43,51.39
  Bottom 0.152: MOD4.1 35.51,6.68 30.3,6.68 19.2,17.78 19.2,49.86 20.94,51.59 25.23,51.59 v25.43,51.39 | v25.43,51.39
AUDIO5  (via drill 0.35)
  Top 0.152: U10.8 26.05,57.68 v26.02,57.65
  Bottom 0.152: MOD5.1 16.59,12.69 15.83,13.45 15.83,53.92 18.62,56.72 25.21,56.72 26.02,57.53 v26.02,57.65
AUDIO6  (via drill 0.35)
  Top 0.152: U10.3 22.8,58.65 21.74,57.59 18.68,57.59 v13.61,52.52
  Bottom 0.152: v13.61,52.52 11.71,50.62 11.71,35.51 6.75,30.55 6.75,25.55 MOD6.1
AUDIO7  (via drill 0.35)
  Top 0.152: v11.07,63.02 15.05,67 21.75,67 22.8,65.95 U10.18
  Bottom 0.152: v11.07,63.02 11.07,55.7 6.37,51 6.37,46.43 8,44.8 MOD7.1
AUDIO8
  Top 0.152: MOD8.1 7.95,64.87 8,64.92 11.65,64.92 15.34,68.61 24.69,68.61 26.05,67.25 U10.13
B1
  Top 0.813: JP2.4 127.31,62.99 134,69.69 PUMP.3
B2
  Top 0.813: PUMP.4 136.5,69.77 127.31,60.58 126.62,60.58 JP2.3
CLOCK_IN
  Top 0.152: JP3.2 64.68,56.04 R26.1
DIR
  Top 0.152: U2.12 135.07,29.7 136.75,31.38 136.75,52.07 135.33,53.49 135.33,67.29 137.46,69.42 137.46,71.9 138.72,73.15 JP1.8
ENABLE
  Top 0.152: JP1.1 139.19,53.47 140.84,51.82 140.84,15.13 135.09,9.38 U2.4
FILL_VALVE
  Top 0.406: U6.14 U6.15
  Top 0.508: U6.14 69.64,35.81 71.14,34.32 71.14,29.92 73.17,27.89 93.7,27.89 96.31,30.5 FILL_VALVE.1
FILL_VALVE_MAN
  Top 0.152: R6.2 80.28,21.43 FILL_BTN.P$3 FILL_BTN.P$4 70,21.67 70,25.85 64.28,31.57 64.28,34.49 62.96,35.81 U6.3
FILL_VALVE_PROG
  Top 0.152: U6.2 64.21,37.08 65.17,38.05 65.17,51.74 66.67,53.23 66.67,57.62 65.57,58.72 JP3.3
FLUSH
  Top 0.152: R1.1 102.54,27.16 104.89,29.51 111.5,29.51 112.89,30.91 124.74,30.91 128.61,34.78 U2.14
FLUSH_BTN_OUT
  Top 0.152: R1.2 R4.2 102.54,21.75 100.66,19.87 FLUSH.P$3 FLUSH.P$4
GND  (via drill 0.35)
  Top 0.152: U6.4 62.48,34.54 63.5,33.53 63.5,32.39 | 63.5,32.39 63.5,31.24 | 63.5,30.43 63.5,29.78 63.19,29.46 U6.8 | 63.5,30.43 63.5,31.24 | U6.5 62.61,33.27 63.5,32.39 | U6.6 62.74,32 63.5,31.24 | R4.1 v102.54,19.49 | v92.13,19.36 R5.1 | R6.1 81.07,24.18 v81.05,24.2 | R20.1 64.09,22.43 64.83,22.43 v64.92,22.51 | R19.1 64.89,25.07 v64.92,25.09 | v65.43,28.01 64.92,28.01 64.67,27.76 R21.1 | U1.1 23.26,37.52 23.26,38.62 v23.23,38.65 | R24.1 41.68,57.84 v41.68,58.75 | R22.1 44.35,57.88 v44.35,58.75 | R23.1 47.01,57.86 v47.01,58.75 | R10.1 17.14,27.27 v17.17,27.25 | R9.1 18.77,27.2 v18.69,27.12 | R8.1 20.29,27.18 v20.34,27.12 | R7.1 21.69,27.18 v21.74,27.12 | R11.1 v17.55,41.73 | R12.1 19.08,41.34 v18.69,41.73 | R13.1 20.75,41.58 v20.72,41.6 | R14.1 22.27,41.5 v22.38,41.6 | U10.4 23.45,58.42 v23.39,58.37 | U10.6 U10.7 | U9.7 U9.6 | U9.4 25.38,50.57 v25.43,50.62 | U10.17 23.45,66.06 v23.39,66.11 | U10.14 25.4,66.12 C20.2 | U9.14 23.43,42.98 C23.2 | U9.17 25.38,42.91 v25.42,42.87 | v49.05,71.83 48.97,71.75 R3.1 | U7.2 55.65,50.4 55.12,50.4 54.61,50.9 R37.2 | R27.2 60.2,63.98 v60.22,63.95 | 63.5,30.43 63.19,30.73 U6.7
  Top 0.508: v64.55,40.25 U5.8 | U11.3 v24.41,55.07 | C7.2 v43.58,35.25 | C4.2 v44.6,35.25 | C6.2 24.03,39.9 v24.03,40.59 | C3.2 25.19,40.56 v25.17,40.59 | C5.2 23.37,28.04 v23.39,28.01 | C8.2 24.26,28.04 v24.28,28.01 | U4.7 v34.7,35.38 v34.69,35.38 | U1.19 22.67,30.34 v22.63,30.3 | U11.6 21.04,55.09 19.45,55.09 C19.1 19.2,55.09 v19.2,54.43 C17.2 | U10.6 24.75,58.77 25.15,58.37 C21.2 25.15,57.58 v24.91,57.35 | U9.6 24.08,50.71 C22.2 v23.01,51 | C20.2 25.15,67.23 v25.17,67.26 | C23.2 23.67,42.01 v23.64,41.98 | C9.2 44.29,26.24 v43.58,26.24 | C10.2 44.29,25.22 v43.58,25.22 | IC1.10 48.87,27.2 v48.92,27.25 | C11.2 43.89,42.19 v43.97,42.11 | C12.2 43,42.19 v43.08,42.11 | IC2.10 42.9,44.87 43.2,44.56 v43.46,44.56 | C15.2 v57.05,52.88 C16.2 | U7.2 56.54,50.24 v56.79,49.98 | C13.2 v57.68,57.89 C14.2 | v57.81,55.07 U8.2 | U3.7 32.92,31 32.77,30.84 v32.77,30.56 v32.76,30.55 | U6.8 62.37,29.41 v60.86,29.41 | U1.10 17.47,36.22 v17.55,36.14 | 118.28,44.96 114.83,44.96 U2.23
  Top 0.813: C1.2 123.19,53.72 v121.03,53.72 | U2.18 v124.86,44.94 | v124.86,44.94 124.84,44.96 118.28,44.96 | v117.5,32.11 114.93,32.11 U2.28 | U2.3 130.28,6.84 v130.17,6.73 | v119.13,6.86 119.11,6.84 U2.38 | U2.8 134.11,19.61 v134.11,19.81 | U2.D2 124.49,45.31 v124.86,44.94 | U2.13 134.15,32.2 v131.21,32.2
  Top 1.524: C2.2 107.9,70.48 106.81,70.48
  Top 2.54: 106.81,70.48 105.03,68.71 v103.12,68.71
  pour Route2: 4.34,0 arc-90 0,4.34 0,77.03 arc-90 5.7,82.73 137.19,82.73 arc-90 142.85,77.06 142.85,6.31 arc-90 136.55,0
LED1  (via drill 0.35)
  Top 0.152: IC2.1 31.47,46.5 35.08,50.11 44.47,50.11 49.93,55.57 49.93,60.91 48.54,62.3 v43.46,62.3 | v90.07,15.44 93.31,12.19 MOD1.6
  Bottom 0.152: v90.07,15.44 49.55,15.44 41.17,23.82 41.17,61.41 42.06,62.3 v43.46,62.3
LED2  (via drill 0.35)
  Top 0.152: IC2.2 32.74,47.01 35.46,49.73 44.73,49.73 50.44,55.45 50.44,61.16 48.66,62.94 43.47,62.94 v43.46,62.95 | v69.11,14.93 72.66,11.38 MOD2.6
  Bottom 0.152: v69.11,14.93 49.17,14.93 40.41,23.7 40.41,61.94 41.42,62.95 v43.46,62.95
LED3  (via drill 0.35)
  Top 0.152: IC2.3 34.01,46.76 36.47,49.22 44.98,49.22 50.95,55.19 50.95,61.41 48.79,63.57 43.49,63.57 v43.46,63.61 | v48.16,14.93 52.04,11.05 MOD3.6
  Bottom 0.152: v48.16,14.93 39.77,23.31 39.77,62.34 41.04,63.61 v43.46,63.61
LED4  (via drill 0.35)
  Top 0.152: IC2.4 35.28,46.5 37.62,48.84 45.36,48.84 51.46,54.94 51.46,61.67 49.05,64.08 43.46,64.08 v43.46,64.26 | v31.77,14.04 31.87,13.94 MOD4.6
  Bottom 0.152: v43.46,64.26 40.54,64.26 38.88,62.61 38.88,23.19 31.77,16.08 v31.77,14.04
LED5  (via drill 0.35)
  Top 0.152: IC2.5 36.55,46.63 38.38,48.46 45.62,48.46 52.02,54.86 52.02,61.81 49.1,64.73 43.26,64.73 43.26,64.72 v31.39,64.72
  Bottom 0.152: MOD5.6 15.17,13.52 15.17,65.39 18.06,68.27 27.84,68.27 v31.39,64.72
LED6  (via drill 0.35)
  Top 0.152: IC2.6 37.82,46.5 39.27,47.95 45.74,47.95 52.55,54.76 52.55,61.93 49,65.48 v31.39,65.48
  Bottom 0.152: v31.39,65.48 27.96,68.91 17.55,68.91 14.11,65.47 14.11,32.93 10.49,29.31 MOD6.6
LED7  (via drill 0.35)
  Top 0.152: IC2.7 39.09,46.5 40.16,47.57 46,47.57 52.96,54.53 52.96,62.17 48.88,66.24 v31.39,66.24
  Bottom 0.152: v31.39,66.24 28.09,69.54 17.04,69.54 12.98,65.48 12.98,53 MOD7.6
LED8  (via drill 0.35)
  Top 0.152: IC2.8 40.36,46.25 41.3,47.19 46.25,47.19 53.49,54.43 53.49,62.3 48.92,66.88 31.42,66.88 v31.39,66.9
  Bottom 0.152: MOD8.6 28.34,69.95 v31.39,66.9
LICK1
  Top 0.152: MOD1.7 90.6,8.05 82.06,16.58 29.49,16.58 22.38,23.7 22.38,27.71 22.38,28.67 21.69,29.37 R7.2 21.69,30.73 21.37,31.04 U1.17
LICK1_2_7_8_OR
  Top 0.152: U4.3 39.78,36.01 41.05,34.74 U4.13
LICK1_2_OR
  Top 0.152: U3.11 29.12,38.95 29.74,39.57 39.1,39.57 41.05,37.62 U4.2
LICK1_DIG
  Top 0.152: U1.3 22.04,37.45 22.04,36.55 22.79,35.8 26.05,35.8 26.57,36.33 U3.13 26.57,38.65 R15.1
LICK2
  Top 0.152: MOD2.7 69.37,8.1 61.77,15.69 28.98,15.69 20.98,23.69 20.98,28.67 20.29,29.37 R8.2 20.29,30.71 20.07,30.93 U1.15
LICK2_DIG
  Top 0.152: U1.5 20.74,36.93 22.16,35.51 26.95,35.51 27.84,36.41 U3.12 27.84,38.67 R16.1
LICK3
  Top 0.152: MOD3.7 49.58,8.05 42.7,14.93 28.22,14.93 19.46,23.69 19.46,28.67 18.77,29.37 R9.2 U1.13
LICK3_4_5_6_OR
  Top 0.152: U4.6 36.09,36.82 36.09,36.41 39.78,32.73 U4.12
LICK3_4_OR
  Top 0.152: U3.8 32.92,38.01 33.98,39.06 37.23,39.06 38.51,37.79 U4.4
LICK3_DIG
  Top 0.152: U1.7 19.44,36.93 21.24,35.13 29.06,35.13 30.36,36.43 30.36,36.97 U3.10 30.39,38.67 R17.1
LICK4
  Top 0.152: MOD4.7 30.86,11.02 17.93,23.95 17.93,29.05 R10.2 17.14,31.23 U1.11
LICK4_DIG
  Top 0.152: R18.1 31.66,38.71 U3.9 31.63,36.97 31.63,36.68 29.69,34.75 19.71,34.75 18.12,36.33 U1.9
LICK5  (via drill 0.35)
  Top 0.152: v14.58,36.65 14.58,37.36 16.28,39.06 17.42,39.06 R11.2 17.82,38.94 18.63,38.13 18.63,37.61 U1.8
  Bottom 0.152: MOD5.7 10.5,10.6 14.58,14.68 v14.58,36.65
LICK5_6_OR
  Top 0.152: U3.6 31.66,32.98 33.83,35.16 33.83,37.65 34.49,38.3 36.6,38.3 37.24,37.66 U4.5
LICK5_DIG
  Top 0.152: R32.1 30.43,32.02 U3.5 30.39,32.7 28.73,34.36 20.34,34.36 18.12,32.14 U1.12
LICK6
  Top 0.152: U1.6 20.07,37.99 19.1,38.96 R12.2 18.18,39.86 16.36,39.86 13.41,36.91 13.41,32.96 10.78,30.32 MOD6.7
LICK6_DIG
  Top 0.152: R33.1 29.16,32.02 U3.4 29.09,32.09 29.09,32.89 28.07,33.91 21.25,33.91 19.42,32.08 U1.14
LICK7
  Top 0.152: MOD7.7 10.87,50.9 19.96,41.8 19.96,39.74 R13.2 20.75,38.7 21.36,38.09 21.36,37.48 U1.4
LICK7_8_OR
  Top 0.152: U3.3 27.84,30.01 28.84,29.01 40.23,29.01 41.79,30.57 41.79,36.67 42.06,36.95 U4.1
LICK7_DIG
  Top 0.152: R34.1 26.87,31.01 26.57,31.31 U3.2 26.55,32.09 26.55,33.02 25.94,33.63 22.14,33.63 20.72,32.21 U1.16
LICK8  (via drill 0.35)
  Top 0.152: v11.58,53.29 11.58,51.69 21.58,41.69 21.58,39.47 22.14,38.9 R14.2 22.27,38.4 22.67,38 U1.2
  Bottom 0.152: MOD8.7 8.2,70.84 8.2,70.23 9.46,68.98 10.66,68.98 11.58,68.06 v11.58,53.29
LICK8_DIG
  Top 0.152: R35.1 25.6,31.01 25.3,31.31 U3.1 25.3,32.45 24.41,33.35 23.01,33.35 22.02,32.36 U1.18
LICK_BUS_INT
  Top 0.152: IC1.19 55.27,27.2 54.51,27.96 54.51,39.44 57.05,41.98 57.05,48.05 U7.3 55.81,49.48 55.6,49.27 R37.1
LICK_BUS_INT2
  Top 0.152: R36.1 60.33,51.55 61.73,51.55 63.82,53.64 JP3.1
LICK_IN  (via drill 0.35)
  Top 0.152: LICK_IN.1 48.42,68.45 R3.2 | v35.96,33.86 U4.9
  Bottom 0.152: LICK_IN.1 35.96,65.56 v35.96,33.86
LICK_OUT
  Top 0.152: U4.8 34.82,31.9 R25.2
M0
  Top 0.152: JP1.2 138.72,57.91 137.46,56.66 137.46,54.34 140.08,51.72 140.08,16.78 135.21,11.92 U2.5
M1
  Top 0.152: U2.9 134.73,22.08 139.29,26.65 139.29,51.73 137.06,53.97 137.06,57.91 139.19,60.04 JP1.3
M2
  Top 0.152: JP1.4 139.19,62.58 136.52,59.91 136.52,53.85 138.56,51.82 138.56,28.34 134.83,24.62 U2.10
MOD_OR
  Top 0.152: U4.10 U4.11
N$4  (via drill 0.35)
  Top 0.152: R25.1 37.59,30.07 v37.62,30.05
  Bottom 0.152: v37.62,30.05 37.87,30.3 37.87,63.7 40.73,66.57 80.24,66.57 81.92,68.24 LICK_OUT.1
N$7
  Top 0.152: U8.3 56.09,54.12 54.12,56.08 54.12,60.91 R27.1 60.71,67.47 CLOCK_IN.1
N$8
  Top 0.152: U8.4 60.64,54.12 R26.2
N$10
  Top 0.152: R15.2 28.91,42.62 41.9,42.62 45.89,38.63 IC1.1
N$11
  Top 0.152: IC1.2 45.95,37.36 41.2,42.11 29.66,42.11 R16.2
N$12
  Top 0.152: R17.2 30.32,40.41 31.52,41.6 40.54,41.6 46.05,36.09 IC1.3
N$13
  Top 0.152: 46.78,34.95 IC1.4 46.05,34.82 39.87,41 32.27,41 R18.2
N$14
  Top 0.152: R32.2 31.06,27.6 39.98,27.6 45.92,33.55 IC1.5
N$15
  Top 0.152: R33.2 30.27,27.12 40.92,27.12 46.07,32.28 IC1.6
N$16
  Top 0.152: IC1.7 45.94,31.01 41.59,26.65 28.46,26.65 R34.2
N$17
  Top 0.152: IC1.8 45.94,29.74 42.32,26.12 27.72,26.12 R35.2
N$18
  Top 0.152: R36.2 59.71,49.3 58.56,49.32 U7.4
N$19
  Top 0.508: C18.1 26.67,53.8 U11.2
N$20
  Top 0.508: U11.4 26.92,56.34 C18.2
REV
  Top 0.152: R2.1 92.68,25 95.09,27.41 100.11,27.41 104.75,32.05 110.79,32.05 112.31,33.58 124.98,33.58 128.72,37.32 U2.15
REV_BTN_OUT
  Top 0.152: R2.2 R5.2 89.99,19.95 REV.P$3
  Bottom 0.152: REV.P$3 REV.P$4
SCL
  Top 0.152: IC2.12 45.44,43.94 47.59,41.78 Q3.3 | IC1.12 48.36,24.66 49.55,25.85 49.55,37.41 51.86,39.72 Q3.3 | R30.1 52.4,42.78 51.86,42.24 Q3.3
SCL_PI  (via drill 0.35)
  Top 0.152: R28.1 49.51,41.07 Q3.2 49.99,40.59 v51.33,40.59
  Bottom 0.152: v51.33,40.59 53.24,40.59 58.8,46.15 102.67,46.15 106.93,50.4 RPI_CONN.6
SD1
  Top 0.152: IC2.21 40.36,54.34 36.63,50.62 34.48,50.62 27.95,44.09 U9.20
SD2
  Top 0.152: IC2.22 39.09,54.34 35.9,51.15 34.38,51.15 28.66,45.44 22.45,45.44 21.52,44.51 21.52,44.13 U9.11
SD3
  Top 0.152: IC2.23 37.94,55.17 37.94,54.47 35.16,51.69 34.26,51.69 30.66,48.08 22.5,48.08 21.48,49.1 U9.10
SD4
  Top 0.152: IC2.24 36.54,54.59 31.07,49.12 27.84,49.12 U9.1
SD5
  Top 0.152: IC2.25 35.28,54.76 33.68,53.16 30.63,53.16 29.23,54.56 29.23,56.21 27.35,58.09 U10.10
SD6
  Top 0.152: U10.1 21.5,59.9 22.76,61.16 27.07,61.16 29.61,58.62 29.61,54.81 30.88,53.54 33.3,53.54 34.01,54.25 IC2.26
SD7
  Top 0.152: IC2.27 32.74,54.63 32.03,53.92 31.01,53.92 30,54.94 30,61.03 27.46,63.57 22.25,63.57 21.5,64.33 U10.20
SD8
  Top 0.152: IC2.28 30.83,55.3 30.38,55.75 30.38,61.29 27.35,64.32 U10.11
SDA
  Top 0.152: IC2.13 46.71,47.01 48.27,48.57 51.42,48.57 Q4.3 | R29.2 54.56,47.33 53.77,46.53 Q4.3 | IC1.13 48.74,23.39 50.57,25.22 50.57,36.9 54.91,41.25 54.91,44.12 53.77,45.26 Q4.3
SDA_PI  (via drill 0.35)
  Top 0.152: R31.2 51.52,45.41 Q4.2 51.77,45.28 51.8,45.31 v52.88,45.31
  Bottom 0.152: RPI_CONN.4 106.93,52.94 101.3,47.32 56.16,47.32 54.15,45.31 v52.88,45.31
STEP
  Top 0.152: U2.11 135.07,27.16 137.64,29.73 137.64,51.96 135.99,53.61 135.99,67.16 139.19,70.36 JP1.7
USB_SHIELD  (3 unrouted)
VALVE1
  Top 0.508: U6.16 69.52,38.35 72.67,35.2 72.67,30.43 73.81,29.28 83.33,29.28 VALVE1.1
VALVE1_PROG
  Top 0.152: IC1.21 57.12,29.74 61.11,33.73 61.11,37.29 62.18,38.35 U6.1
VALVE2
  Top 0.508: VALVE2.1 74.34,36.5 69.33,41.51 U5.10
VALVE2_PROG
  Top 0.152: IC1.22 56.99,31.01 60.6,34.62 60.6,40.17 61.95,41.51 U5.7
VALVE3  (via drill 0.35)
  Top 0.508: U5.11 69.33,42.78 70.51,41.6 v77.75,41.6
  Bottom 0.508: v77.75,41.6 93.48,41.6 VALVE3.1
VALVE3_PROG
  Top 0.152: IC1.23 57.37,32.28 60.09,35 60.09,40.8 62.07,42.78 U5.6
VALVE4  (via drill 0.35)
  Top 0.508: v78.38,42.87 71.4,42.87 70.22,44.05 U5.12
  Bottom 0.508: v78.38,42.87 83.58,42.87 VALVE4.1
VALVE4_PROG
  Top 0.152: U5.5 62.16,44.05 59.59,41.48 59.59,35.66 57.67,33.74 57.55,33.62 57.48,33.55 IC1.24
VALVE5
  Top 0.508: U5.13 71.62,45.32 72.38,44.56 VALVE5.1
VALVE5_PROG
  Top 0.152: U5.4 62.25,45.32 59.08,42.15 59.08,36.78 57.12,34.82 IC1.25
VALVE6  (via drill 0.35)
  Top 0.508: U5.14 71.56,46.59 76.73,51.76 v76.86,51.76
  Bottom 0.508: v76.86,51.76 90.56,51.76 VALVE6.1
VALVE6_PROG
  Top 0.152: U5.3 62.25,46.59 58.57,42.91 58.57,37.67 56.99,36.09 IC1.26
VALVE7  (via drill 0.35)
  Top 0.508: U5.15 70.8,47.86 v76.86,53.92
  Bottom 0.508: VALVE7.1 85.27,57.38 81.81,53.92 v76.86,53.92
VALVE7_PROG
  Top 0.152: U5.2 62.2,47.86 58.06,43.72 58.06,38.42 57,37.36 IC1.27
VALVE8
  Top 0.508: U5.16 68.54,49.13 74.34,54.94 VALVE8.1
VALVE8_PROG
  Top 0.152: IC1.28 56.56,38.63 57.55,39.63 57.55,44.1 U5.1

## Text on the board
SilkscreenTop: - | + | A2 | A1 | B1 | B2 | GND | DIR | FAULT | STEP | A2 | SLEEP | A1 | RESET | B1 | M2 | B2 | M1 | GND | M0 | VMOT | EN | FILL VALVE | REV | FLUSH